# Altium PCB PCB_Tsal.PcbDoc
Units mm, origin at the board's own origin, x right, y up, seen from the top; angles counter-clockwise.
Board outline 45.5 x 40 mm, 2 copper layers (Top Layer, Bottom Layer); 14 components, 10 nets, 36 pads, 0 vias.
Unrouted connection lines stored in the file: 22.
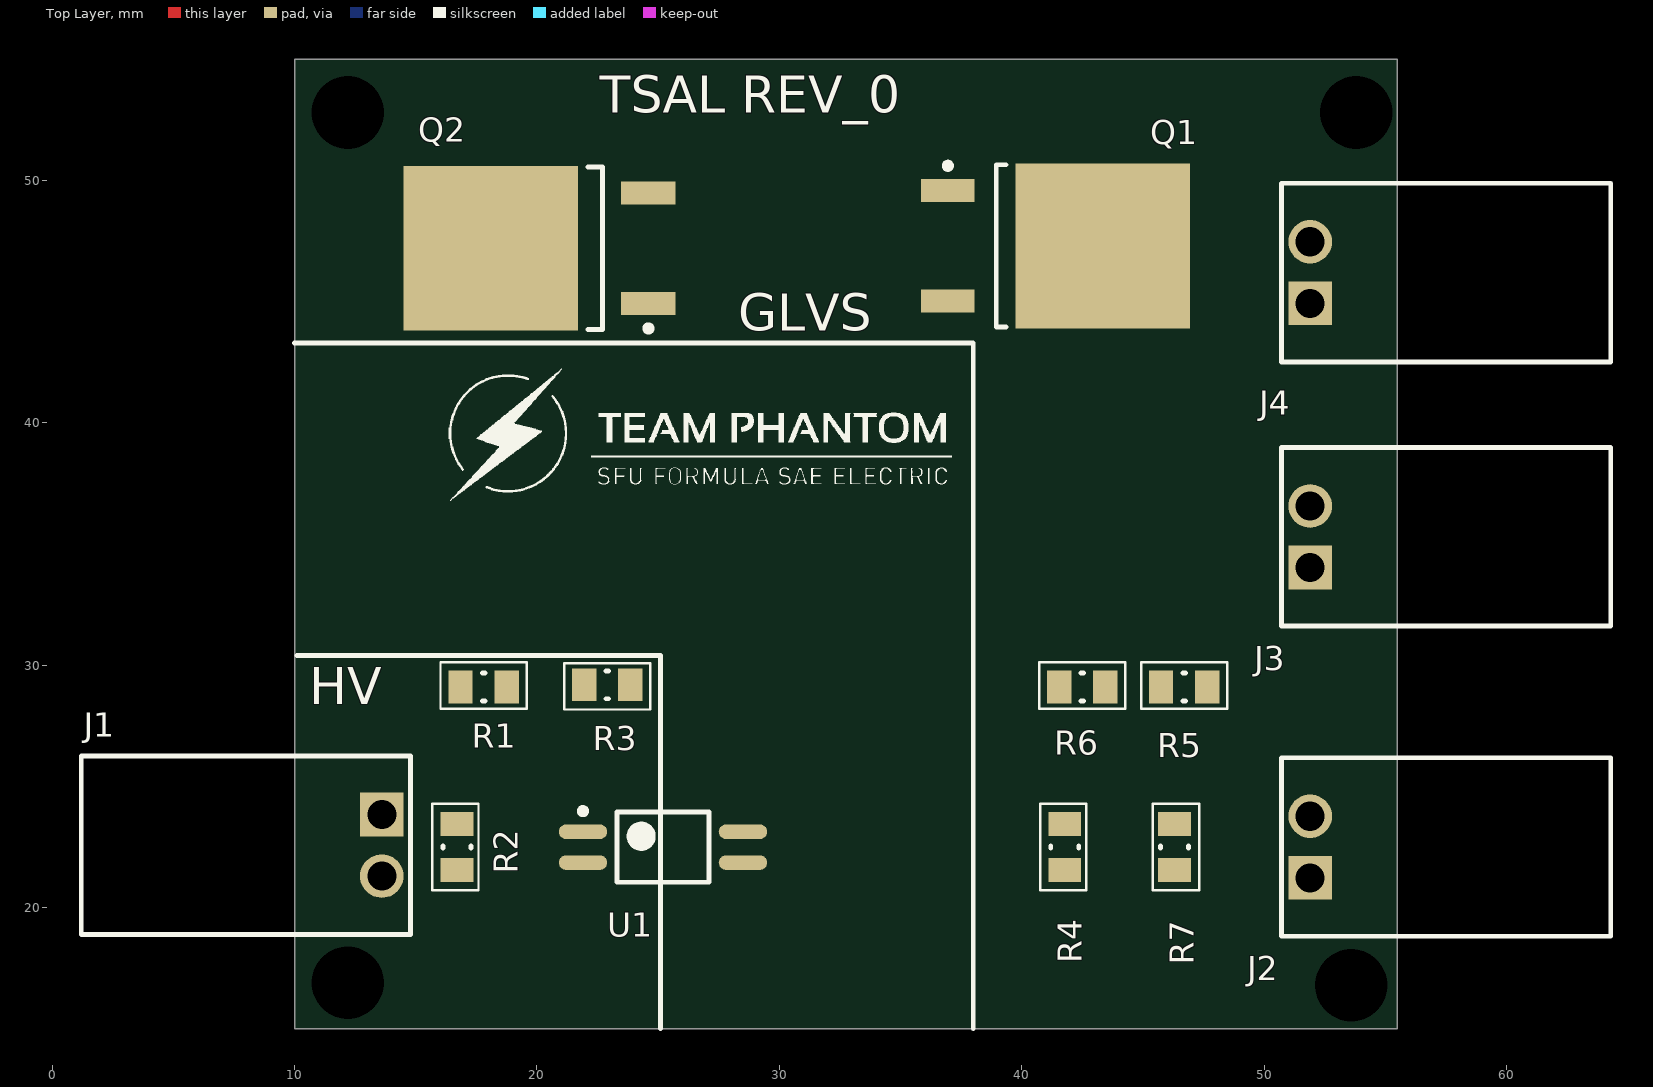
[diagram p0: Top Layer view]
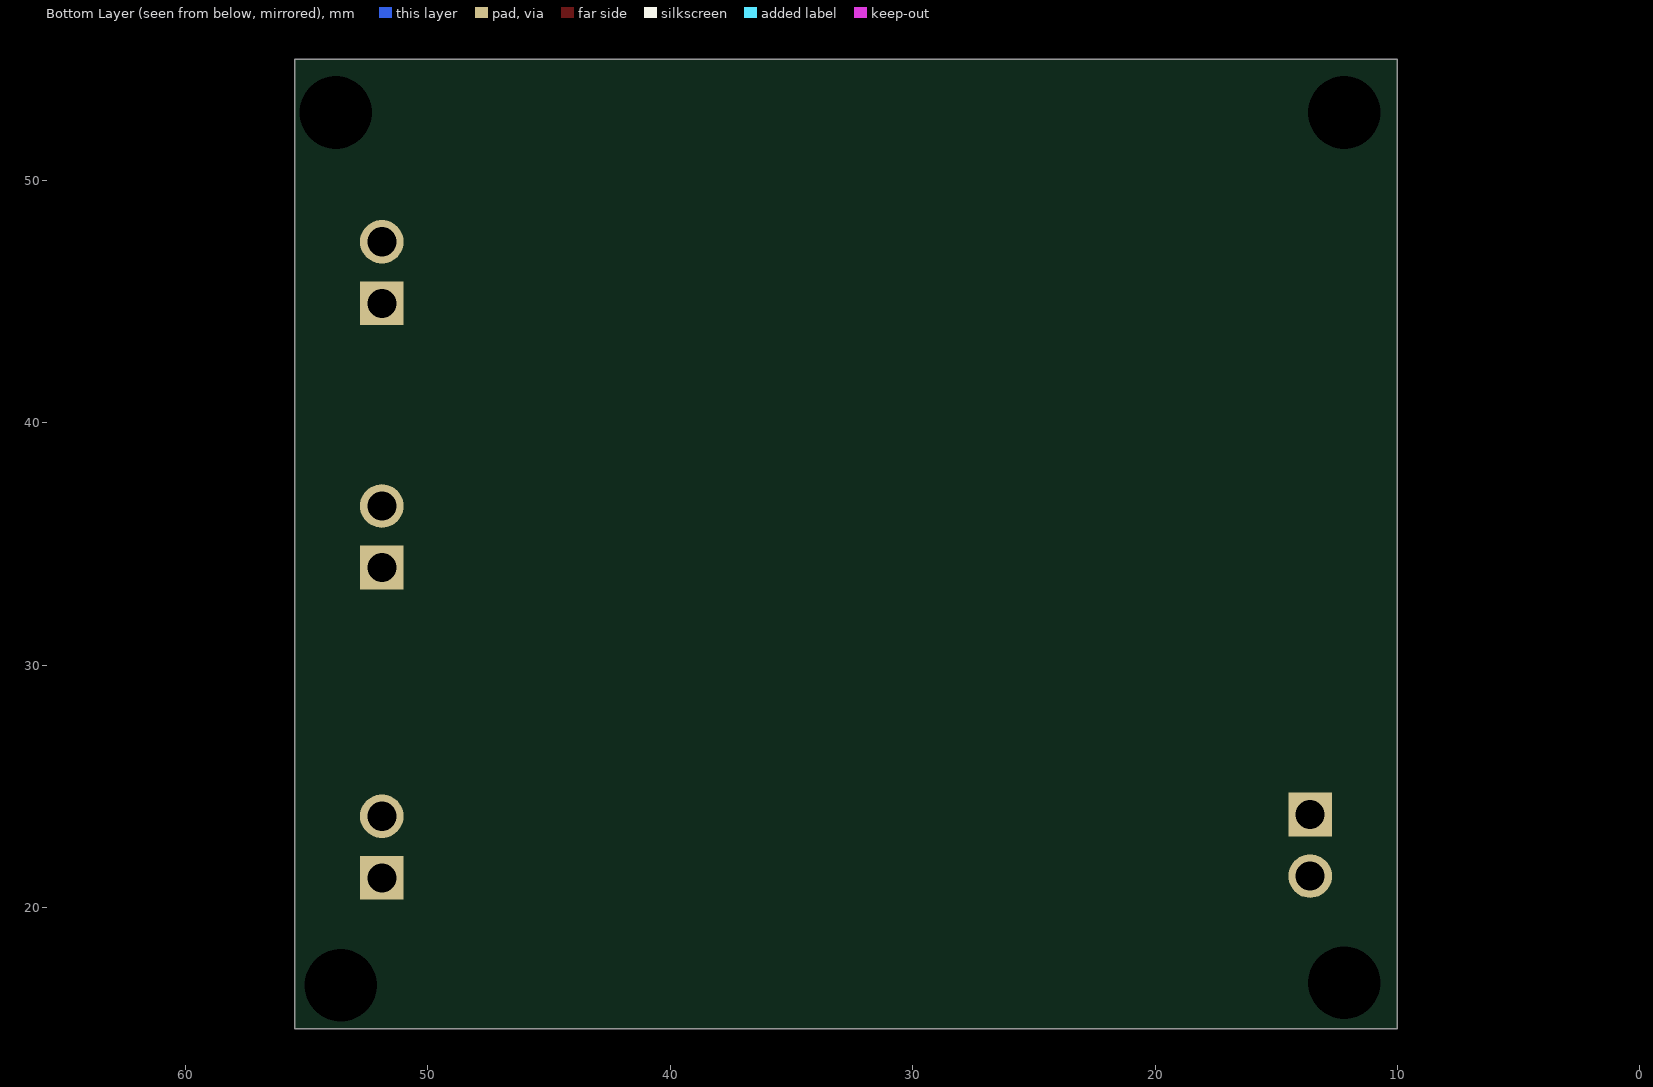
[diagram p1: Bottom Layer view, seen from below]

## Layer stack, top to bottom
Top Solder: solder mask 0.0102, Solder Resist, Dk 3.5
Top Layer: signal copper 0.0356
Dielectric 1: dielectric 0.32, FR-4, Dk 4.8
Bottom Layer: signal copper 0.0356
Bottom Solder: solder mask 0.0102, Solder Resist, Dk 3.5

## Board outline
10,15 55.5,15 55.5,55 10,55

## Design rules (kind name [scope] priority, off if disabled: settings)
Clearance [All] p1: gap=0.254 ignorepadtopadclearanceinfootprint=TRUE except(0: Arc-Hole Track-Hole SMDPad-Hole THPad-Hole Via-Hole Fill-Hole Poly-Hole Region-Hole Text-Hole)
PolygonConnect [All] p1: connectstyle=Relief reliefconductorwidth=0.254 reliefentries=4 polygonreliefangle="90 Angle" airgapwidth=0.254
RoutingVias [All] p1: holewidth=0.711 width=1.27 viastyle="Through Hole" minholewidth=0.711 minwidth=1.27 maxholewidth=0.711 maxwidth=1.27
SolderMaskExpansion [All] p1: expansion=0.102
Width [All] p1: maxlimit=1 minlimit=0.254 preferedwidth=0.3 minimp=50.000000 maximp=50.000000 favimp=50.000000
30 further rules are at their usual default settings.

## Components (designator, comment, footprint, x,y, rotation, side; value= is the part's Value field where it differs from the comment)
J1 "HV" 2_PIN_CONNECTOR 1.2,22.57 r270 top
J2 "LV" 2_PIN_CONNECTOR 64.3,22.5 r90 top
J3 "RED LED" 2_PIN_CONNECTOR 64.3,35.3 r90 top
J4 "GREEN LED" 2_PIN_CONNECTOR 64.3,46.2 r90 top
Q1 "NTD2955T4G" DPAK228P991X238-3N 41.4,47.3 r0 top
Q2 "IPD50N06S4L-12" DPAK228P998X235-3N 20.1,47.2 r180 top
R1 "1MOhm" RESC2012X06N 17.8,29.1 r0 top
R2 "30MOhm" RESC2012X06N 16.7,22.5 r90 top
R3 "190Ohm" RESC2012X06N 22.9,29.191 r180 top
R4 "1MOhm" RESC2012X06N 41.775,22.5 r90 top
R5 "10KOhm" RESC2012X06N 46.7,29.1 r0 top
R6 "100Ohm" RESC2012X06N 42.5,29.1 r0 top
R7 "100Ohm" RESC2012X06N 46.3,22.5 r270 top
U1 "EL3H7(B)(TA)-VG" SOIC127P700X200-4N 25.2,22.495 r0 top

## Footprints (in the part's own frame and the unit in brackets; to place one, negate y for a bottom-side part, rotate by r counter-clockwise, add the part's x,y. Pads: shape width x height; smd on the part's side, far side on the other; paste and mask are expansions set on the pad)
2_PIN_CONNECTOR [mm]
  rect 1.8x1.8 hole 1.2: 1(-1.27,12.4)
  round 1.8 hole 1.2: 2(1.27,12.4)
  silkscreen extent -3.68,0 3.68,13.59, body extent -3.68,0 3.68,13.59, height 4.06
DPAK228P991X238-3N [mm] "D-PAK, 3-Pads, Body 6.21x6.73mm (max), IPC Medium Density"
  rect 2.2x0.95 smd: 1(-4.45,2.28) 3(-4.45,-2.28)
  rect 7.2x6.8 smd: 4(1.95,0)
  silkscreen extent -4.57,-3.35 -2.05,3.43, body extent -4.6,-3.37 5.31,3.37, height 2.38
DPAK228P998X235-3N [mm] "D-PAK, 3-Pads, Body 6.31x6.69mm (max), IPC Medium Density"
  rect 2.25x0.95 smd: 1(-4.5,2.28) 3(-4.5,-2.28)
  rect 7.2x6.8 smd: 4(2,0)
  silkscreen extent -4.62,-3.35 -2,3.43, body extent -4.62,-3.32 5.36,3.32, height 2.45
RESC2012X06N [mm] "Chip Resistor, 2-Leads, Body 2.00x1.25mm, IPC Medium Density"
  rect 1x1.35 smd: 1(-0.95,0) 2(0.95,0)
  silkscreen extent -1.78,-0.89 1.78,1.02, body extent -1.1,-0.67 1.1,0.67, height 0.6
SOIC127P700X200-4N [mm] "SOIC, 4-Leads, Body 2.70x4.40mm, Pitch 1.27mm, IPC Medium Density"
  oval 2x0.6 smd: 1(-3.3,0.635) 2(-3.3,-0.635) 3(3.3,-0.635) 4(3.3,0.635)
  silkscreen extent -3.42,-1.45 1.9,1.61, body extent -2.3,-1.45 2.3,1.45, height 2

## Part data
J1 J2 J3 J4: library part 0705530001, Color=Black, Contact Resistance=30mR, Manufacturer=Molex, Max Operating Temperature=105°C, Min Operating Temperature=-40°C, Supplier Part Number 1=WM4900-ND, ComponentLink1Description=https://www.molex.com/pdm_docs/ps/PS-70400.pdf?src-supplier=Digi-Key, ComponentLink1URL=https://www.molex.com/pdm_docs/ps/PS-70400.pdf?src-supplier=Digi-Key, ComponentLink2Description=http://www.molex.com/webdocs/datasheets/pdf/en-us/0705530001_PCB_HEADERS.pdf?src-supplier=Avnet, ComponentLink2URL=http://www.molex.com/webdocs/datasheets/pdf/en-us/0705530001_PCB_HEADERS.pdf?src-supplier=Avnet, Connector Type="Male Pin", Contact Material=Bronze, Contact Mating Length=0.24inch, Contact Plating=Gold, Depth=13.59mm, Fastening Type=Latch, Housing Color=Black, Housing Material=Polyester, Length=7.37mm, Manufacturer Part Number=0705530001, Mount="Through Hole", Number of Contacts=2, Number of Positions=2, Number of Rows=1, Orientation="Right Angle", Packaging=Rail/Tube, Pitch=2.54mm, Pricing 1="1=0.71, 72=0.53486, 144=0.51264, 504=0.44575, 1008=0.36775, 5040=0.32318, 10008=0.30089 (USD)", Radiation Hardening=No, Stock 1=14591, Supplier 1=Digi-Key, Termination=Solder
Q1: "Trans MOSFET P-CH 60V 12A 3-Pin(2+Tab) DPAK T/R", Case/Package=DPAK, Continuous Drain Current (ID)=12A, Current Rating=-12A, Drain to Source Breakdown Voltage=-60V, Drain to Source Resistance=155mR, Gate to Source Voltage (Vgs)=20V, Input Capacitance=750pF, Manufacturer="ON Semiconductor", Max Operating Temperature=175°C, Max Power Dissipation=55W, Min Operating Temperature=-55°C, On-State Resistance=180mR, Package Quantity=1, Supplier Part Number 1=NTD2955T4GOSCT-ND, Threshold Voltage=-2.8V, ComponentLink1Description=http://www.onsemi.com/pub/Collateral/NTD2955-D.PDF?src-supplier=Avnet, ComponentLink1URL=http://www.onsemi.com/pub/Collateral/NTD2955-D.PDF?src-supplier=Avnet, ComponentLink2Description=http://www.onsemi.com/pub/Collateral/NTD2955-D.PDF?src-supplier=Avnet+Europe, ComponentLink2URL=http://www.onsemi.com/pub/Collateral/NTD2955-D.PDF?src-supplier=Avnet+Europe, ComponentLink3Description=http://www.onsemi.com/pub_link/Collateral/NTD2955-D.PDF?src-supplier=Element14, ComponentLink3URL=http://www.onsemi.com/pub_link/Collateral/NTD2955-D.PDF?src-supplier=Element14, ComponentLink4Description=http://www.onsemi.com/pub/Collateral/NTD2955-D.PDF?src-supplier=Digi-Key, ComponentLink4URL=http://www.onsemi.com/pub/Collateral/NTD2955-D.PDF?src-supplier=Digi-Key, ComponentLink5Description=http://www.jameco.com/Jameco/Products/ProdDS/1178118.pdf?src-supplier=Jameco, ComponentLink5URL=http://www.jameco.com/Jameco/Products/ProdDS/1178118.pdf?src-supplier=Jameco, Contact Plating=Matte,Tin, Drain to Source Voltage (Vdss)=-60V, Element Configuration=Single, Fall Time=48ns, Height=2.38mm, Lead Free="Lead Free", Length=6.73mm, Manufacturer Part Number=NTD2955T4G, Nominal Vgs=-2.8V, Number of Channels=1, Number of Elements=1, Number of Pins=3, Packaging="Tape and Reel", Power Dissipation=55W, Pricing 1="1=1.04, 10=0.912, 100=0.7036, 500=0.52118, 1000=0.41694 (USD)", Radiation Hardening=No, Rds On Max=180mR, REACH SVHC="No SVHC", Rise Time=45ns, Stock 1=44767, Supplier 1=Digi-Key, Turn-Off Delay Time=26ns, Turn-On Delay Time=10ns, Voltage Rating (DC)=-60V, Width=6.22mm
Q2: "MOSFET N-CH 60V 50A TO252-3-11", Case/Package=TO-252-3, Continuous Drain Current (ID)=50A, Drain to Source Resistance=21.6mR, Drain to Source Voltage (Vdss)=60V, Gate to Source Voltage (Vgs)=16V, Input Capacitance=2.89nF, Manufacturer=Infineon, Max Operating Temperature=175°C, Max Power Dissipation=50W, Min Operating Temperature=-55°C, Package Quantity=2500, Supplier Part Number 1=IPD50N06S4L12ATMA1CT-ND, ComponentLink1Description=http://www.infineon.com/dgdl/Infineon-IPD50N06S4L_12-DS-v01_00-en.pdf?folderId=db3a30431a5c32f2011a8084a04a6500&fileId=db3a30431ff9881501203885cc580ca0&ack=t&src-supplier=Digi-Key, ComponentLink1URL=http://www.infineon.com/dgdl/Infineon-IPD50N06S4L_12-DS-v01_00-en.pdf?folderId=db3a30431a5c32f2011a8084a04a6500&fileId=db3a30431ff9881501203885cc580ca0&ack=t&src-supplier=Digi-Key, Element Configuration=Single, Fall Time=5ns, Halogen Free="Halogen Free", Height=2.3mm, Lead Free="Lead Free", Length=6.5mm, Manufacturer Part Number=IPD50N06S4L-12, Max Dual Supply Voltage=60V, Number of Pins=3, Packaging="Tape and Reel", Pricing 1="1=0.78, 10=0.689, 100=0.5268, 500=0.41736, 1000=0.33429 (USD)", Rds On Max=12mR, Rise Time=2ns, Stock 1=0, Supplier 1=Digi-Key, Turn-Off Delay Time=25ns, Turn-On Delay Time=6ns, Width=6.22mm
R1 R4: library part ERA-6AEB105V, "RES SMD 191 OHM 1% 1/8W 0805", Case/Package=0805, Case Code (Metric)=2012, Manufacturer=Panasonic, Max Operating Temperature=155°C, Max Power Dissipation=125mW, Min Operating Temperature=-55°C, Package Quantity=1, Resistance=1MR, Supplier Part Number 1=P1MDACT-ND, Temperature Coefficient=25ppm/°C, Voltage Rating=100V, Case Code (Imperial)=0805, ComponentLink1Description=http://uk.rs-online.com/webdocs/0bee/0900766b80beefcc.pdf?src-supplier=RSComponents, ComponentLink1URL=http://uk.rs-online.com/webdocs/0bee/0900766b80beefcc.pdf?src-supplier=RSComponents, ComponentLink2Description=http://www.farnell.com/datasheets/485442.pdf?src-supplier=Element14, ComponentLink2URL=http://www.farnell.com/datasheets/485442.pdf?src-supplier=Element14, ComponentLink3Description=https://industrial.panasonic.com/cdbs/www-data/pdf/RDM0000/AOA0000C307.pdf?src-supplier=Future+Electronics, ComponentLink3URL=https://industrial.panasonic.com/cdbs/www-data/pdf/RDM0000/AOA0000C307.pdf?src-supplier=Future+Electronics, ComponentLink4Description=http://www.farnell.com/datasheets/2052875.pdf?src-supplier=Farnell, ComponentLink4URL=http://www.farnell.com/datasheets/2052875.pdf?src-supplier=Farnell, ComponentLink5Description=http://industrial.panasonic.com/www-data/pdf/AOA0000/AOA0000CE26.pdf?src-supplier=Avnet, ComponentLink5URL=http://industrial.panasonic.com/www-data/pdf/AOA0000/AOA0000CE26.pdf?src-supplier=Avnet, ComponentLink6Description=http://www.alliedelec.com/m/d/b6b0537e86f421aa7f5975bb1d8f429a.pdf?src-supplier=Allied+Electronics, ComponentLink6URL=http://www.alliedelec.com/m/d/b6b0537e86f421aa7f5975bb1d8f429a.pdf?src-supplier=Allied+Electronics, ComponentLink7Description=http://www.farnell.com/datasheets/485442.pdf?src-supplier=Farnell, ComponentLink7URL=http://www.farnell.com/datasheets/485442.pdf?src-supplier=Farnell, ComponentLink8Description=http://industrial.panasonic.com/www-data/pdf/AOA0000/AOA0000CE26.pdf?src-supplier=Avnet+Europe, ComponentLink8URL=http://industrial.panasonic.com/www-data/pdf/AOA0000/AOA0000CE26.pdf?src-supplier=Avnet+Europe, ComponentLink9Description=http://www.produktinfo.conrad.com/datenblaetter/450000-474999/458432-da-01-en-WIDERSTAND_0805_ERA.pdf?src-supplier=Conrad, ComponentLink9URL=http://www.produktinfo.conrad.com/datenblaetter/450000-474999/458432-da-01-en-WIDERSTAND_0805_ERA.pdf?src-supplier=Conrad, Composition="Thin Film", Contact Plating=Tin, Depth=1.25mm, Features="Automotive AEC-Q200", Height=0.5mm, Lead Free="Lead Free", Length=2mm, Manufacturer Part Number=ERA-6AEB105V, Military Standard=Not, Mount="Surface Mount", Number of Pins=2, Number of Terminations=2, Packaging="Tape and Reel", Power Rating=125mW, Pricing 1="1=0.36, 10=0.302, 100=0.1182, 1000=0.04948, 2500=0.04536 (USD)", Radiation Hardening=No, REACH SVHC="No SVHC", Stock 1=237802, Supplier 1=Digi-Key, Termination=Solder, Voltage Rating (DC)=100V, Width=1.25mm, Working Voltage=100V
R2: library part HMC0805JT30M0, "RES 30M OHM 5% 1/8W 0805", Case/Package=0805, Case Code (Metric)=2012, Manufacturer="Stackpole Electronics", Max Operating Temperature=125°C, Max Power Dissipation=125mW, Min Operating Temperature=-55°C, Package Quantity=1, Resistance=30MR, Supplier Part Number 1=HMC0805JT30M0CT-ND, Temperature Coefficient=400ppm/°C, Tolerance=5%, Case Code (Imperial)=0805, Composition="Thick Film", Height=0.024inch, Length=0.079inch, Manufacturer Part Number=HMC0805JT30M0, Mount="Surface Mount", Number of Terminations=2, Packaging="Tape and Reel", Pricing 1="1=0.23, 10=0.191, 100=0.0745, 1000=0.03119, 2500=0.02859 (USD)", Stock 1=5938, Supplier 1=Digi-Key, Width=0.049inch
R3: library part RC0805FR-0719R1L, Case/Package=0805, Case Code (Metric)=2012, Manufacturer=Yageo, Max Operating Temperature=155°C, Min Operating Temperature=-55°C, Power Rating=125mW, Resistance=19.1R, Supplier Part Number 1=311-19.1CRCT-ND, Temperature Coefficient=100ppm/°C, Tolerance=1%, Voltage Rating=150V, Case Code (Imperial)=0805, Composition="Thick Film", Contact Plating=Tin,Matte, Depth=1.25mm, Height=0.5mm, Lead Free="Lead Free", Length=2mm, Manufacturer Part Number=RC0805FR-0719R1L, Military Standard=Not, Packaging="Tape and Reel", Pricing 1="1=0.1, 10=0.042, 100=0.017, 1000=0.00762, 2500=0.00662 (USD)", Radiation Hardening=No, Stock 1=17015, Supplier 1=Digi-Key, Termination=SMD/SMT, Voltage Rating (DC)=150V, Width=1.25mm
R5: library part RNCF0805DTE10K0, Case/Package=0805, Case Code (Metric)=2012, Manufacturer="Stackpole Electronics", Max Operating Temperature=155°C, Max Power Dissipation=125mW, Min Operating Temperature=-55°C, Resistance=10kR, Supplier Part Number 1=RNCF0805DTE10K0CT-ND, Temperature Coefficient=25ppm/°C, Tolerance=0.5%, Case Code (Imperial)=0805, ComponentLink1Description=https://www.verical.com/server-webapp/html/getDatasheet?partID=508893&src-supplier=Verical, ComponentLink1URL=https://www.verical.com/server-webapp/html/getDatasheet?partID=508893&src-supplier=Verical, Composition="Thin Film", Contact Plating=Tin,Matte, Depth=1.25mm, Features="Moisture Resistant", Height=0.026inch, Length=2mm, Manufacturer Part Number=RNCF0805DTE10K0, Military Standard=Not, Mount="Surface Mount", Number of Terminations=2, Packaging="Tape and Reel", Pricing 1="1=0.17, 10=0.14, 100=0.0546, 1000=0.02287, 2500=0.02096 (USD)", Radiation Hardening=No, Stock 1=712311, Supplier 1=Digi-Key, Width=0.049inch
R6 R7: library part TNPW0402100RBEED, "RES SMD 100 OHM 0.1% 1/8W 0805", Case/Package=0402, Case Code (Metric)=1005, Manufacturer="Vishay Dale", Max Operating Temperature=125°C, Max Power Dissipation=63mW, Min Operating Temperature=-55°C, Package Quantity=1, Resistance=100R, Supplier Part Number 1=TNP100DACT-ND, Temperature Coefficient=25ppm/°C, Tolerance=0.1%, Voltage Rating=50V, Case Code (Imperial)=0402, ComponentLink1Description=http://www.vishay.com/docs/28758/tnpw_e3.pdf?src-supplier=Digi-Key, ComponentLink1URL=http://www.vishay.com/docs/28758/tnpw_e3.pdf?src-supplier=Digi-Key, ComponentLink2Description=http://www.vishay.com/docs/49252/_dbr_smd_resistor_product_overview_vmn_sg2189_1705.pdf?src-supplier=Digi-Key, ComponentLink2URL=http://www.vishay.com/docs/49252/_dbr_smd_resistor_product_overview_vmn_sg2189_1705.pdf?src-supplier=Digi-Key, ComponentLink3Description=http://www.farnell.com/datasheets/2049119.pdf?src-supplier=Element14, ComponentLink3URL=http://www.farnell.com/datasheets/2049119.pdf?src-supplier=Element14, Composition="Thin Film", Contact Plating=Tin, Depth=0.5mm, Features="Moisture Resistant,Automotive AEC-Q200,Anti-Sulfur", Height=0.016inch, Lead Free="Lead Free", Length=0.039inch, Manufacturer Part Number=TNPW0402100RBEED, Military Standard=Not, Number of Terminations=2, Packaging="Tape and Reel", Power Rating=63mW, Pricing 1="1=0.65, 10=0.462, 100=0.2402, 1000=0.12936, 2500=0.1276 (USD)", Radiation Hardening=No, REACH SVHC=Unknown, Stock 1=69380, Supplier 1=Digi-Key, Termination=SMD/SMT, Voltage Rating (DC)=50V, Width=0.02inch
U1: "OPTOISOLATOR 3.75KV TRANS 4-SSOP", Case/Package=SSOP, Collector Emitter Breakdown Voltage=80V, Collector Emitter Saturation Voltage=200mV, Current Transfer Ratio=260%, Forward Current=50mA, Forward Voltage=1.4V, Isolation Voltage=3.75kV, Manufacturer=Everlight, Max Operating Temperature=125°C, Max Power Dissipation=200mW, Min Operating Temperature=-55°C, Package Quantity=1, Reverse Breakdown Voltage=6V, Supplier Part Number 1=1080-1197-6-ND, Approvals=UL, Collector Emitter Voltage (VCEO)=80V, ComponentLink1Description=https://everlightamericas.com/index.php?controller=attachment&id_attachment=2584&src-supplier=Digi-Key, ComponentLink1URL=https://everlightamericas.com/index.php?controller=attachment&id_attachment=2584&src-supplier=Digi-Key, ComponentLink2Description=https://everlightamericas.com/index.php?controller=attachment&amp;id_attachment=2584&src-supplier=Digi-Key, ComponentLink2URL=https://everlightamericas.com/index.php?controller=attachment&amp;id_attachment=2584&src-supplier=Digi-Key, ComponentLink3Description=https://www.verical.com/server-webapp/html/getDatasheet?partID=416716&src-supplier=Verical, ComponentLink3URL=https://www.verical.com/server-webapp/html/getDatasheet?partID=416716&src-supplier=Verical, Fall Time=18000ns, Lead Free="Lead Free", Manufacturer Part Number=EL3H7(B)(TA)-VG, Max Collector Current=50mA, Max Input Current=50mA, Max Output Voltage=80V, Mount="Surface Mount", Number of Channels=1, Number of Elements=1, Number of Pins=4, Output Current per Channel=50mA, Packaging="Tape and Reel", Power Dissipation=200mW, Pricing 1="1=0.42, 10=0.304, 25=0.248, 100=0.1985, 250=0.16752, 500=0.1427, 1000=0.11167, 2500=0.10237 (USD)", Radiation Hardening=No, Rise Time=18000ns, Stock 1=119652, Supplier 1=Digi-Key

## Free pads (board coordinates)
  round 1.2 hole 3: 2(12.2,16.9) 2(12.2,52.8) 2(53.6,16.8) 2(53.8,52.8)

## Nets (pads, with @x,y where several pads share a name; then routed paths per layer and width w, separated by ;. In a path a pad name is that pad's centre, name@x,y a point inside that pad or via, vN(x,y) a via of type N, cw(c..) or ccw(c..) an arc to the next point about the centre after c; other vN are vias at no path point)
ANODE: R3.2 U1.1
"GATE N": Q1.3 Q2.1 R4.2
HV+: J1.1 R1.2
HV-: J1.2 R2.1 U1.2
LV+: J2.1 R5.2 R7.2
LV-: J2.2 J3.2 J4.2 Q2.3 R4.1 U1.3
NetJ3_1: J3.1 Q1.4 R6.2 R7.1
NetJ4_1: J4.1 Q2.4 R5.1
"R BIAS": Q1.1 R6.1 U1.4
"R IN": R1.1 R2.2 R3.1

## Silkscreen, mask and mechanical layers (free items; w line width, h text height)
Top Overlay:
  drawing of 44 lines, arcs and shapes, not listed
  text "TSAL REV_0" at 22.59,52.8 h1.52
  text "GLVS" at 28.3,43.8 h1.52
  text "HV" at 10.6,28.4 h1.52
  text "HV_GND" at 79.6,17.1 h1.52

## Dimensions
25.1,15.2 to 38,15 on Top Overlay
10.1,30.4 to 12.2,43.3 on Top Overlay
28.5,23.13 to 41.55,29.1 on Mechanical Dimensions
23.85,29.191 to 41.55,29.1 on Mechanical Dimensions
28.5,21.86 to 41.775,21.55 on Mechanical Dimensions
24.6,44.92 to 21.95,29.191 on Mechanical Dimensions